# Altium PCB ACS_Board_PCB.PcbDoc
Units mil, origin at the board's own origin, x right, y up, seen from the top; angles counter-clockwise.
Board outline 1393.7 x 917.32 mil, 2 copper layers (Top Layer, Bottom Layer); 16 components, 10 nets, 51 pads, 9 vias.
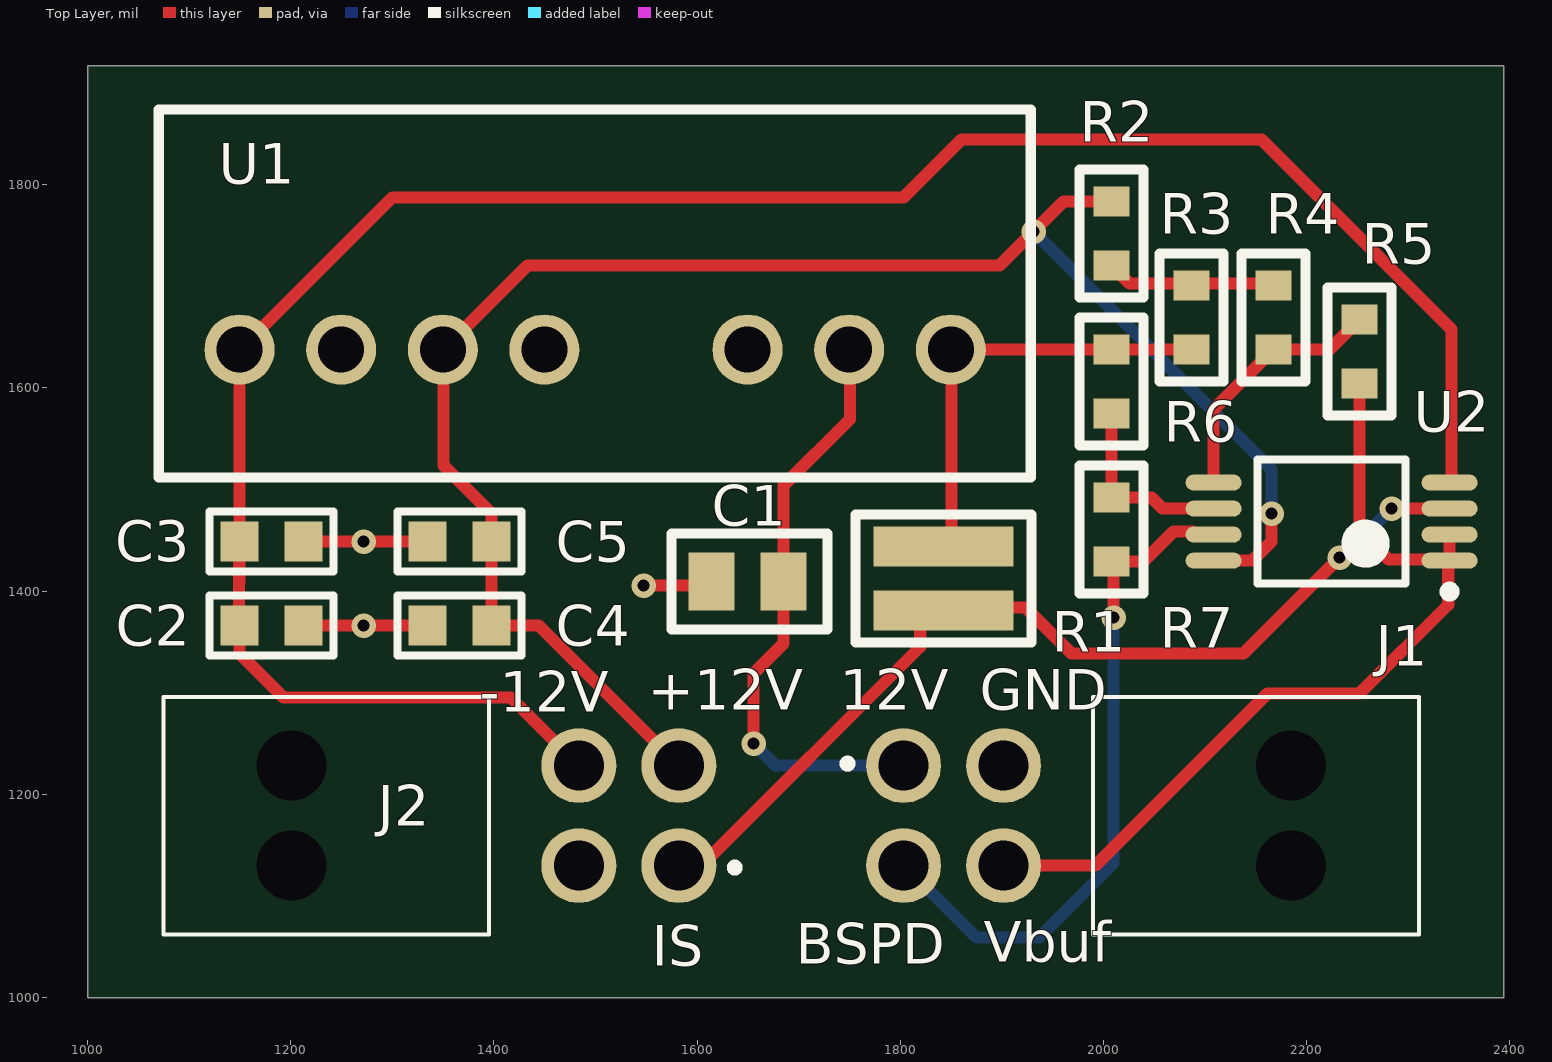
[diagram p0: Top Layer view]
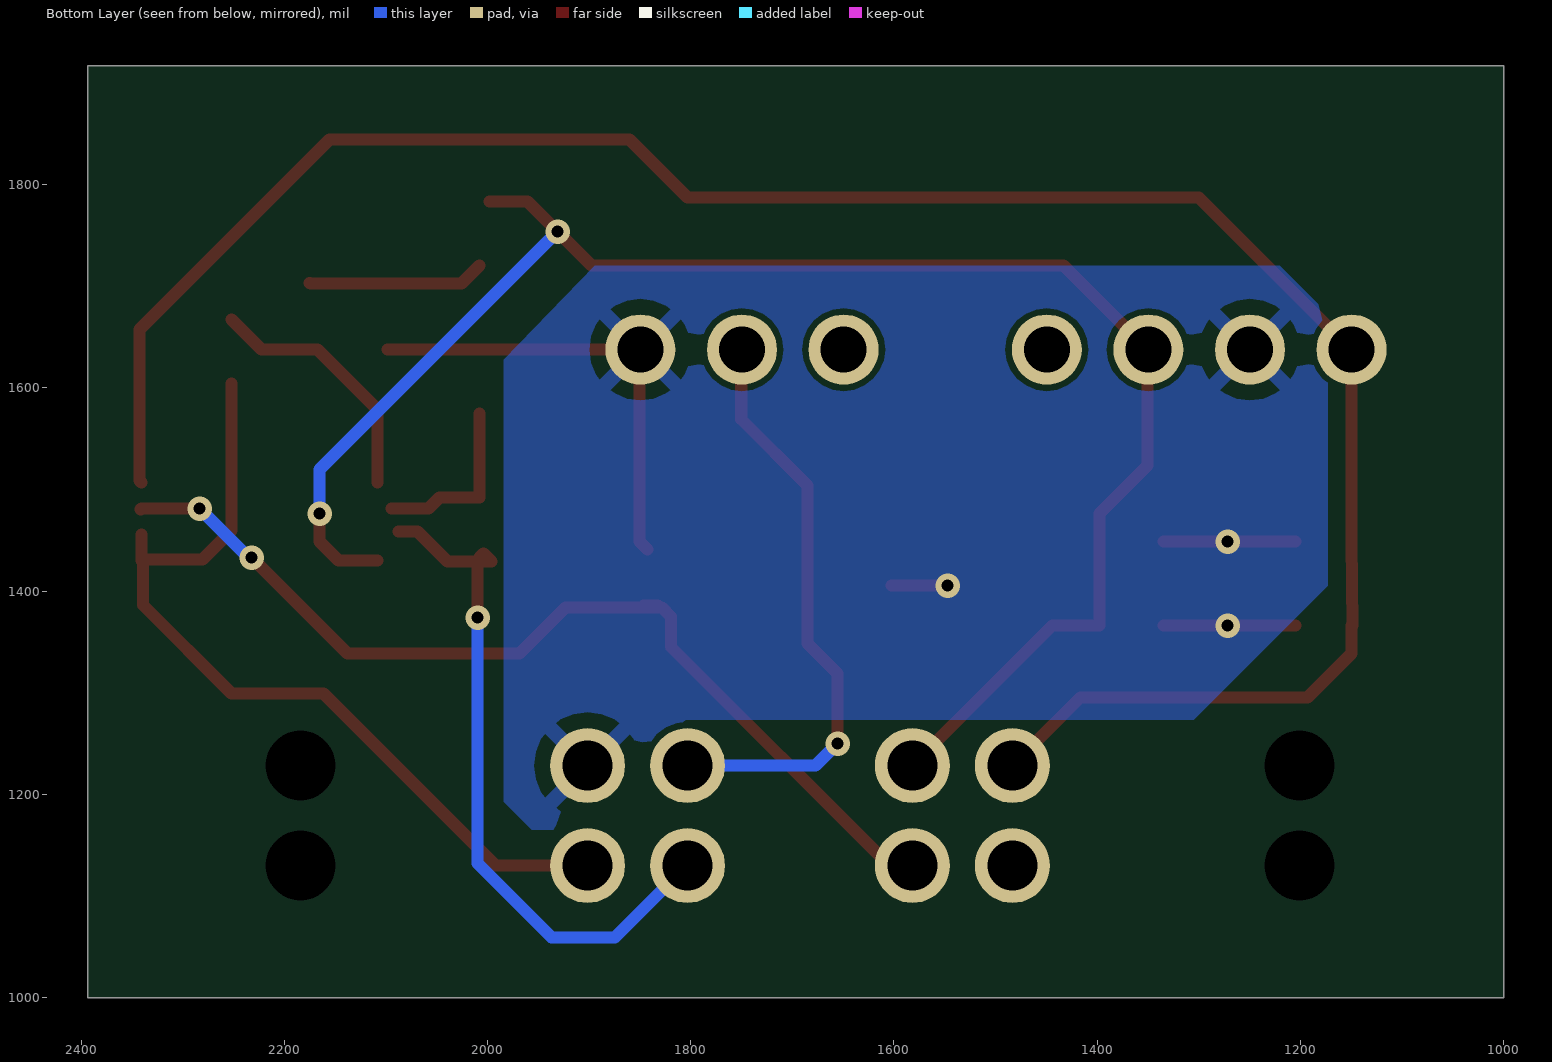
[diagram p1: Bottom Layer view, seen from below]

## Layer stack, top to bottom
Top Solder: solder mask 0.4, Solder Resist, Dk 3.5
Top Layer: signal copper 1.4
Dielectric 1: dielectric 12.6, FR-4, Dk 4.8
Bottom Layer: signal copper 1.4
Bottom Solder: solder mask 0.4, Solder Resist, Dk 3.5

## Board outline
2393.7,1917.32 2393.7,1000 1000,1000 1000,1917.32

## Design rules (kind name [scope] priority, off if disabled: settings)
Clearance [All] p1: gap=6 ignorepadtopadclearanceinfootprint=FALSE
MinimumSolderMaskSliver [All] p1: minsoldermaskwidth=4.92
PlaneClearance [All] p1: clearance=30
PolygonConnect PolygonConnect_1 [All vs isVia] p1: connectstyle=Direct reliefconductorwidth=10 reliefentries=4 polygonreliefangle="90 Angle" airgapwidth=10
PolygonConnect [All] p2: connectstyle=Relief reliefconductorwidth=15 reliefentries=4 polygonreliefangle="45 Angle" airgapwidth=15
RoomDefinition ACS_Board_Schematic [InComponentClass('ACS_Board_Schematic')] p1: confinementstyle=ConfineIn formatcopy=TRUE lockcomponents=FALSE outline 2393.7,1913.39 1000,1913.39 1000,1000 2393.7,1000
RoutingVias [All] p1: holewidth=28 width=50 viastyle="Through Hole" minholewidth=28 minwidth=50 maxholewidth=28 maxwidth=50
SilkToSolderMaskClearance [IsPad] p1: minsilkscreentomaskgap=5.91 clearancetoexposedcopper=TRUE
SolderMaskExpansion [All] p1: expansion=4
Width [All] p1: maxlimit=20 minlimit=10 preferedwidth=10 minimp=50.000000 maximp=50.000000 favimp=50.000000
27 further rules are at their usual default settings.

## Components (designator, comment, footprint, x,y, rotation, side; value= is the part's Value field where it differs from the comment)
C1 "Cap" CAPC2012X12N 1649.61,1409.45 r0 top value=4.7uF
C2 "Cap" CAPC1608X08N 1181.1,1366.14 r180 top value=100nF
C3 "Cap" CAPC1608X08N 1181.1,1448.82 r180 top value=1uF
C4 "Cap" CAPC1608X08N 1366.14,1366.14 r0 top value=100nF
C5 "Cap" CAPC1608X08N 1366.14,1448.82 r0 top value=1uF
J1 "NanoFit4" 1053141304 1803.15,1228.35 r90 top
J2 "NanoFit4" 1053141304 1581.89,1129.92 r270 top
R1 "RCL061227R0FKEA" RCL061227R0FKEA 1842.52,1412.4 r270 top
R2 "Res1" RESC1608X06N 2007.87,1751.97 r90 top value=2300
R3 "Res1" RESC1608X06N 2086.61,1669.29 r90 top value=100
R4 "Res1" RESC1608X06N 2167.32,1669.29 r270 top value=10K
R5 "Res1" RESC1608X06N 2251.97,1635.83 r90 top value=10K
R6 "Res1" RESC1608X06N 2007.87,1606.3 r270 top value=10K
R7 "Res1" RESC1608X06N 2007.87,1460.63 r270 top value=10K
U1 "RS6-1212D" RS6-1212D 1499.21,1692.91 r180 top
U2 "LM258ADGKR" TSOP65P640X120-8N 2224.41,1468.5 r180 top

## Footprints (in the part's own frame and the unit in brackets; to place one, negate y for a bottom-side part, rotate by r counter-clockwise, add the part's x,y. Pads: shape width x height; smd on the part's side, far side on the other; paste and mask are expansions set on the pad)
1053141304 [mm]
  round 1.875 hole 1.25: 1(0,0) 2(-2.5,0) 3(0,-2.5) 4(-2.5,-2.5)
  round 0.875 hole 1.75: 5(-2.5,-9.68) 6(0,-9.68)
  silkscreen extent -4.22,-12.88 1.72,1.5, body extent -4.24,-14.33 1.7,0.33, height 9.35
CAPC1608X08N [mm] "Chip Capacitor, 2-Leads, Body 1.60x0.80mm, IPC Medium Density"
  rect 0.95x1 smd: 1(-0.8,0) 2(0.8,0)
  silkscreen extent -1.55,-0.75 1.55,0.75, body extent -0.87,-0.48 0.87,0.47, height 0.8
CAPC2012X12N [mm] "Chip Capacitor, 2-Leads, Body 2.00x1.25mm, IPC Medium Density"
  rect 1.15x1.45 smd: 1(-0.9,0) 2(0.9,0)
  silkscreen extent -1.9,-1.2 2,1.2, body extent -1.15,-0.72 1.15,0.72, height 1.25
RCL061227R0FKEA [mm]
  rect 1x3.5 smd: 1(-0.8,0) 2(0.8,0)
  silkscreen extent -1.6,-2.2 1.6,2.2
RESC1608X06N [mm] "Chip Resistor, 2-Leads, Body 1.60x0.80mm, IPC Medium Density"
  rect 0.75x0.9 smd: 1(-0.8,0) 2(0.8,0)
  silkscreen extent -1.6,-0.8 1.6,0.8, body extent -0.85,-0.45 0.85,0.45, height 0.55
RS6-1212D [mm]
  round 1.75 hole 1.15: 1(-8.9,1.4) 2(-6.36,1.4) 3(-3.82,1.4) 5(1.26,1.4) 6(3.8,1.4) 7(6.34,1.4) 8(8.88,1.4)
  silkscreen extent -10.9,-4.6 10.9,4.6, body extent -10.9,-4.6 10.9,4.6, height 11.6
TSOP65P640X120-8N [mm] "TSOP, 8-Leads, Body 3.00x4.40mm, Pitch 0.65mm, IPC Medium Density"
  oval 1.4x0.4 smd mask+0.065: 1(-2.95,0.975) 2(-2.95,0.325) 3(-2.95,-0.325) 4(-2.95,-0.975) 5(2.95,-0.975) 6(2.95,-0.325) 7(2.95,0.325) 8(2.95,0.975)
  silkscreen extent -3.08,-1.55 1.85,1.87, body extent -2.25,-1.55 2.25,1.55, height 1.2

## Part data
C1 C2 C3 C4 C5: "Capacitor", LatestRevisionDate=17-Jul-2002, LatestRevisionNote="Re-released for DXP Platform.", PackageDescription="Radial Cap, Thru-Hole; 2 Leads; 0.3 in Pin Spacing", PackageReference=RAD-0.3, Published=8-Jun-2000, Publisher="Altium Limited"
R1: library part Res1, "Resistor", =27, LatestRevisionDate=17-Jul-2002, LatestRevisionNote="Re-released for DXP Platform.", PackageDescription="Axial Device, Thru-Hole; 2 Leads; 0.3 in Pin Spacing", PackageReference=AXIAL-0.3, Published=8-Jun-2000, Publisher="Altium Limited"
R2 R3 R4 R5 R6 R7: "Resistor", LatestRevisionDate=17-Jul-2002, LatestRevisionNote="Re-released for DXP Platform.", PackageDescription="Axial Device, Thru-Hole; 2 Leads; 0.3 in Pin Spacing", PackageReference=AXIAL-0.3, Published=8-Jun-2000, Publisher="Altium Limited"
U2: library part OPAMP2

## Via types
v1: diameter 24, hole 12, Top Layer to Bottom Layer, tented both sides, 9 vias

## Nets (pads, with @x,y where several pads share a name; then routed paths per layer and width w, separated by ;. In a path a pad name is that pad's centre, name@x,y a point inside that pad or via, vN(x,y) a via of type N, cw(c..) or ccw(c..) an arc to the next point about the centre after c; other vN are vias at no path point)
0.5V: R2.1 R3.2 R4.1 | length 174.9
  Top Layer w12: R2.1 2025.59,1702.76 2167.32,1702.76 2173.73,1702.76 R4.1@2175.39,1703.27
+12V: C4.2 C5.2 J2.2 R2.2 U1.6 U2.8 | length 1691.1
  Top Layer w12: U1.6@1342.52,1618.11 1350.39,1610.24 1350.39,1523.62 1397.64,1476.38 C5.2 C4.2 1444.09,1366.14 J2.2 ; U1.6@1350.39,1637.8 1433.07,1720.47 1897.64,1720.47 v1(1931.1,1753.94) 1960.63,1783.46 R2.2@1998.03,1783.46 ; U2.8 2146.65,1430.12 2165.35,1448.82 v1(2165.35,1476.38)
  Bottom Layer w12: v1(1931.1,1753.94) 2165.35,1519.68 v1(2165.35,1476.38)
-12V: C2.2 C3.2 J2.4 U1.8 U2.4 | length 2185.3
  Top Layer w12: C2.2@1148.74,1366.15 C3.2 U1.8 ; C2.2 1149.61,1338.58 1192.91,1295.28 1416.54,1295.28 J2.4 ; U1.8@1150.39,1637.8 1300,1787.4 1803.15,1787.4 1860.24,1844.49 2155.51,1844.49 2342.52,1657.48 2342.52,1508.86 U2.4
GND: C1.1 C2.1 C3.1 C4.1 C5.1 J1.3 R1.1 R3.1 R6.1 U1.1 U1.7 | length 763.1
  Top Layer w12: C2.1@1204.72,1366.14 C2.1 v1(1271.65,1366.14) C4.1 ; C3.1@1204.72,1448.82 C3.1 v1(1271.65,1448.82) C5.1 ; v1(1547.24,1405.51) C1.1@1602.36,1405.51 ; R1.1@1842.52,1440.94 1850.39,1448.82 1850.39,1637.8 R6.1 R3.1@2098.43,1637.8
NetR4_2: R4.2 R5.2 U2.5 | length 252.2
  Top Layer w12: U2.5 2108.27,1578.74 R4.2 2220.47,1637.8 2222.44,1637.8 R5.2
NetR6_2: R6.2 R7.1 U2.6 | length 173.8
  Top Layer w12: R6.2 R7.1 2047.24,1492.13 2058.07,1481.3 U2.6@2094.49,1481.3
Signal: J2.1 R1.2 U2.3 | length 977.2
  Top Layer w12: J2.1 1604.33,1129.92 1819.6,1345.19 1819.6,1375.08 1828.38,1383.86 R1.2@1830.35,1383.86 ; R1.2@1846.46,1385.83 1832.31,1385.83 R1.2@1830.35,1383.86 ; v1(2232.28,1433.07) 2137.8,1338.58 1968.5,1338.58 1923.23,1383.86 1846.46,1383.86 R1.2@1830.35,1383.86 ; v1(2283.46,1481.3) U2.3 U2.3@2341.28,1480.57
  Bottom Layer w12: v1(2232.28,1433.07) 2235.24,1433.07 v1(2283.46,1481.3)
Signal_Buf: J1.4 R5.1 U2.1 U2.2 | length 858
  Top Layer w12: J1.4 1992.13,1129.92 2161.42,1299.21 2251.97,1299.21 2339.27,1386.51 2339.27,1430.12 U2.1 ; R5.1 2251.97,1459.65 2280.53,1431.08 2339.59,1431.08 2340.55,1432.05 U2.2
Signal_Out: J1.2 R7.2 U2.7 | length 693.5
  Top Layer w12: v1(2009.84,1374.02) 2009.84,1427.17 R7.2 ; U2.7@2087.6,1458.66 2068.9,1458.66 2039.37,1429.13 R7.2 ; R7.2 1996.06,1429.13 2003.94,1437.01 2007.87,1433.07 R7.2
  Bottom Layer w12: J1.2@1800,1133.86 1874.8,1059.06 1937.01,1059.06 1937.01,1059.33 2009.84,1132.17 v1(2009.84,1374.02)
Vin: C1.2 J1.1 U1.2 | length 567.3
  Top Layer w12: v1(1655.51,1250) 1655.51,1318.9 1685.04,1348.43 C1.2 1685.04,1503.94 1750.39,1569.29 1750.39,1610.24 U1.2@1742.52,1618.11
  Bottom Layer w12: v1(1655.51,1250) 1677.17,1228.35 J1.1
pads on no net: J1.5 J1.6 J2.3 J2.5 J2.6 U1.3 U1.5

## Polygon pours and split planes (outlines as drawn)
GND on Bottom Layer "Bottom Layer-GND" (solid, pour order 0): 1913.39,1165.35 1805.12,1273.62 1305.12,1273.62 1173.23,1405.51 1173.23,1673.23 1220.47,1720.47 1894.38,1720.47 1984.25,1627.95 1984.25,1192.92 1956.69,1165.35

## Silkscreen, mask and mechanical layers (free items; w line width, h text height)
Top Overlay:
  text "+12V" at 1551.18,1283.46 h40
  text "12V" at 1740.16,1283.46 h40
  text "GND" at 1877.95,1283.46 h40
  text "-12V" at 1385.83,1281.5 h40
  text "Vbuf" at 1881.89,1035.43 h40
  text "BSPD" at 1696.85,1033.46 h40
  text "IS" at 1555.12,1031.5 h40
Mechanical 1:
  lines w10: 998.03,1000 998.03,1919.29 2391.73,1919.29 2391.73,1000 998.03,1000